# Altium PCB PCB-1-Layrer.PcbDoc
Units mm, origin at the board's own origin, x right, y up, seen from the top; angles counter-clockwise.
Board outline 152.4 x 101.6 mm, 2 copper layers (Top Layer, Bottom Layer); 50 components, 45 nets, 199 pads, 0 vias.
Unrouted connection lines stored in the file: 146.
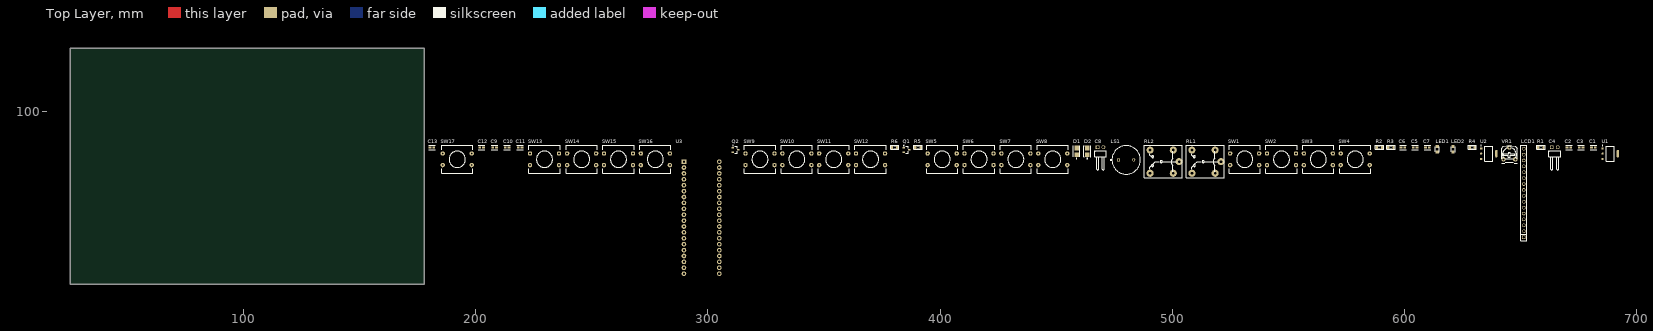
[diagram p0: Top Layer view]
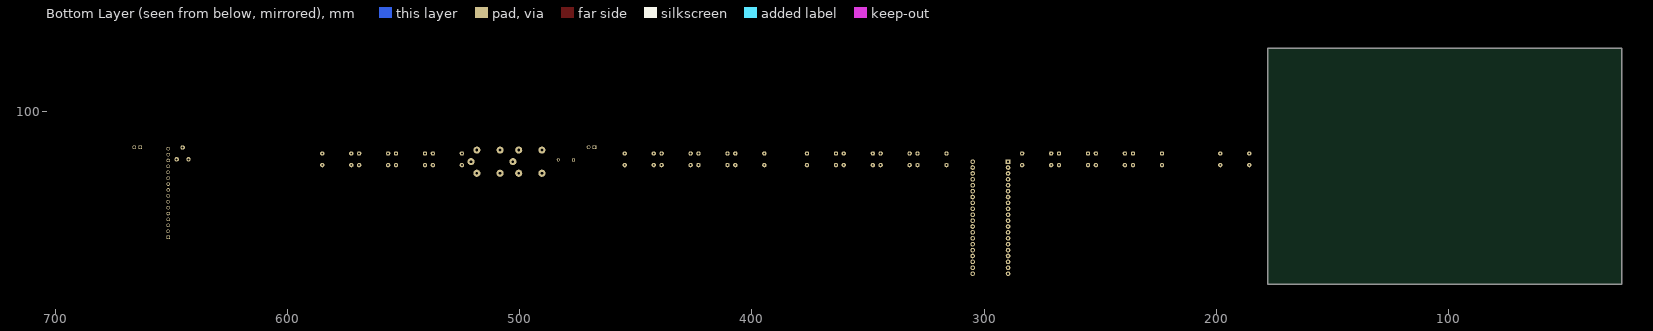
[diagram p1: Bottom Layer view, seen from below]

## Layer stack, top to bottom
Top Solder: solder mask 0.0102, Solder Resist, Dk 3.5
Top Layer: signal copper 0.0356
Dielectric 1: dielectric 0.32, FR-4, Dk 4.8
Bottom Layer: signal copper 0.0356
Bottom Solder: solder mask 0.0102, Solder Resist, Dk 3.5

## Board outline
25.4,25.4 177.8,25.4 177.8,127 25.4,127

## Design rules (kind name [scope] priority, off if disabled: settings)
Clearance [All] p1: gap=0.008 ignorepadtopadclearanceinfootprint=FALSE
PolygonConnect [All] p1: connectstyle=Relief reliefconductorwidth=0.254 reliefentries=4 polygonreliefangle="90 Angle" airgapwidth=0.254
RoutingVias [All] p1: holewidth=0.711 width=1.27 viastyle="Through Hole" minholewidth=0.711 minwidth=1.27 maxholewidth=0.711 maxwidth=1.27
SolderMaskExpansion [All] p1: expansion=0.102 istentingtop=FALSE
SupplyNets "Schematic Supply Nets_4" [InNet('+5V')] p1: voltage=0.000
SupplyNets "Schematic Supply Nets_3" [InNet('+12V')] p2: voltage=0.000
SupplyNets "Schematic Supply Nets_2" [InNet('GND')] p3: voltage=0.000
SupplyNets "Schematic Supply Nets_1" [InNet('+3V3')] p4: voltage=0.000
SupplyNets "Schematic Supply Nets" [InNet('+5')] p5: voltage=0.000
UnRoutedNet [All] p1: checkbadconnections=TRUE
Width [All] p1: maxlimit=0.254 minlimit=0.254 preferedwidth=0.254
29 further rules are at their usual default settings.

## Components (designator, comment, footprint, x,y, rotation, side; value= is the part's Value field where it differs from the comment)
C1 "100n" FP-GRM188-0_1-e0_2_0_55-IPC_A 681.482,84.328 r0 top
C2 "100u" FP-GRM188-0_1-e0_2_0_55-IPC_A 670.941,84.328 r0 top
C3 "10u" FP-GRM188-0_1-e0_2_0_55-IPC_A 676.148,84.328 r0 top
C4 "JP2" JP2-D1C 663.575,84.455 r0 top
C5 "100u" FP-GRM188-0_1-e0_2_0_55-IPC_A 604.647,84.328 r0 top
C6 "10u" FP-GRM188-0_1-e0_2_0_55-IPC_A 599.44,84.328 r0 top
C7 "100n" FP-GRM188-0_1-e0_2_0_55-IPC_A 609.981,84.328 r0 top
C8 "JP2" JP2-D1C 467.868,84.455 r0 top
C9 "0.1u" FP-GRM188-0_1-e0_2_0_55-IPC_A 208.153,84.328 r0 top
C10 "0.1u" FP-GRM188-0_1-e0_2_0_55-IPC_A 213.487,84.328 r0 top
C11 "0.1u" FP-GRM188-0_1-e0_2_0_55-IPC_A 219.075,84.328 r0 top
C12 "0.1u" FP-GRM188-0_1-e0_2_0_55-IPC_A 202.565,84.328 r0 top
C13 "0.1u" FP-GRM188-0_1-e0_2_0_55-IPC_A 181.102,84.328 r0 top
D1 "1N4007 SMD" FP-1N4007_SMD-IPC_C 458.851,82.677 r90 top
D2 "1N4007 SMD" FP-1N4007_SMD-IPC_C 463.423,82.677 r90 top
LCD1 "LCD 16x2A" JP16-C1T 651.51,45.72 r90 top value=LCD16x2A
LED1 "RED" LED-0805-Red 614.172,82.423 r90 top value="LED 3 - 5 ly 2 Colour"
LED2 "GREEN" LED-0805-Green 621.03,82.423 r90 top value="LED 3 - 5 ly 2 Colour"
LS1 "AT-1224-TWT-5V-2-R" FP-AT-1224-TWT-5V-2-R-MFG 480.187,78.994 r0 top
Q1 "S8050-SOT23" SOT95P240X115-3N 385.572,83.312 r0 top
Q2 "S8050-SOT23" SOT95P240X115-3N 311.912,83.312 r0 top
R1 "10K" RES-SMD-0805 658.876,84.455 r0 top
R2 "330" RES-SMD-0805 589.28,84.455 r0 top
R3 "330" RES-SMD-0805 594.233,84.455 r0 top
R4 "20K" RES-SMD-0805 629.285,84.455 r0 top
R5 "1K" RES-SMD-0805 390.525,84.455 r0 top
R6 "1K" RES-SMD-0805 380.492,84.455 r0 top
RL1 "Relay 10A/12V" "Relay - SRA-05VDC-CL" 513.334,78.232 r0 top value="Relay SPDT, 10A, 12V"
RL2 "Relay 10A/12V" "Relay - SRA-05VDC-CL" 495.3,78.232 r0 top value="Relay SPDT, 10A, 12V"
SW1 "SW" SW1-DIP-12x12x8-Black 531.241,79.248 r0 top value="SW chip 2 pin"
SW2 "SW" SW1-DIP-12x12x8-Black 547.116,79.248 r0 top value="SW chip 2 pin"
SW3 "SW" SW1-DIP-12x12x8-Black 562.991,79.248 r0 top value="SW chip 2 pin"
SW4 "SW" SW1-DIP-12x12x8-Black 578.866,79.248 r0 top value="SW chip 2 pin"
SW5 "SW" SW1-DIP-12x12x8-Black 400.939,79.248 r0 top value="SW chip 2 pin"
SW6 "SW" SW1-DIP-12x12x8-Black 416.814,79.248 r0 top value="SW chip 2 pin"
SW7 "SW" SW1-DIP-12x12x8-Black 432.689,79.248 r0 top value="SW chip 2 pin"
SW8 "SW" SW1-DIP-12x12x8-Black 448.564,79.248 r0 top value="SW chip 2 pin"
SW9 "SW" SW1-DIP-12x12x8-Black 322.453,79.248 r0 top value="SW chip 2 pin"
SW10 "SW" SW1-DIP-12x12x8-Black 338.328,79.248 r0 top value="SW chip 2 pin"
SW11 "SW" SW1-DIP-12x12x8-Black 354.203,79.248 r0 top value="SW chip 2 pin"
SW12 "SW" SW1-DIP-12x12x8-Black 370.078,79.248 r0 top value="SW chip 2 pin"
SW13 "SW" SW1-DIP-12x12x8-Black 229.616,79.248 r0 top value="SW chip 2 pin"
SW14 "SW" SW1-DIP-12x12x8-Black 245.618,79.248 r0 top value="SW chip 2 pin"
SW15 "SW" SW1-DIP-12x12x8-Black 261.493,79.248 r0 top value="SW chip 2 pin"
SW16 "SW" SW1-DIP-12x12x8-Black 277.368,79.248 r0 top value="SW chip 2 pin"
SW17 "SW" SW1-DIP-12x12x8-Black 192.024,79.248 r0 top value="SW chip 2 pin"
U1 "AMS1117-3.3" FP-AMS1117-IPC_C 688.721,81.661 r0 top
U2 "AMS1117-3.3" FP-AMS1117-IPC_C 636.397,81.661 r0 top
U3 "STM32_Bluepill" STM32F103_BluePill 297.307,54.102 r0 top
VR1 "20k" VR-S2 642.747,79.248 r0 top value="Volume 50k"

## Footprints (in the part's own frame and the unit in brackets; to place one, negate y for a bottom-side part, rotate by r counter-clockwise, add the part's x,y. Pads: shape width x height; smd on the part's side, far side on the other; paste and mask are expansions set on the pad)
FP-1N4007_SMD-IPC_C [mm]
  rect 2.1x2 smd paste+0 mask+0: 1(-1.45,0) 2(1.45,0)
  silkscreen extent -3.25,-1.45 2.3,1.45, body extent -2.6,-1.55 2.6,1.55, height 0.25
FP-AMS1117-IPC_C [mm]
  rect 1.004x0.872 smd paste+0 mask+0: 1(-3.295,2.29)
  rrect100% 1.004x0.872 smd paste+0 mask+0: 2(-3.295,0) 3(-3.295,-2.29)
  rrect87% 1.004x3.182 smd paste+0 mask+0: 4(3.295,0)
  silkscreen extent -3.42,-3.25 1.75,3.62, body extent -3.9,-3.35 3.9,3.35, height 0.25
FP-AT-1224-TWT-5V-2-R-MFG [mm]
  rect 1.35x1.35 hole 0.85 paste-2539.97 mask+0: 1(-3.25,0)
  round 1.35 hole 0.85 paste-2539.97 mask+0: 2(3.25,0)
  silkscreen extent -6.75,-6.15 6.15,6.15, body extent -6.25,-6.25 6.25,6.25, height 0.25
FP-GRM188-0_1-e0_2_0_55-IPC_A [mm]
  rect 1.208x1.012 smd paste+0 mask+0: 1(-0.802,0) 2(0.802,0)
  silkscreen extent -1.41,-0.91 1.41,0.91, body extent -1.91,-1.01 1.91,1.01, height 0.25
JP2-D1C [mm] "2 pins, 1 row, right angled, gold plating"
  rect 1.6x1.6 hole 1.1: 1(0,0)
  round 1.6 hole 1.1: 2(2.54,0)
  silkscreen extent -1.27,-9.88 3.81,-1.5, body extent -1.27,-10.06 3.81,0.3, height 2.55
JP16-C1T [mm] "16 row, straight, gold plating"
  rect 1.52x1.52 hole 1.02: 1(0,0)
  round 1.52 hole 1.02: 2(2.54,0) 3(5.08,0) 4(7.62,0) 5(10.16,0) 6(12.7,0) 7(15.24,0) 8(17.78,0) 9(20.32,0) 10(22.86,0) 11(25.4,0) 12(27.94,0) 13(30.48,0) 14(33.02,0) 15(35.56,0) 16(38.1,0)
  silkscreen extent -1.52,-1.27 39.62,1.27, body extent -1.52,-1.25 39.62,1.25, height 8.51
LED-0805-Green [mil]
  rect 50x55 smd: 1(0,0) 2(90,0)
  silkscreen extent 0,-35 90,35, body extent 5,-25 85,25, height 43
LED-0805-Red [mil]
  rect 50x55 smd: 1(0,0) 2(90,0)
  silkscreen extent 0,-35 90,35, body extent 5,-25 85,25, height 43
"Relay - SRA-05VDC-CL" [mil] "15.5 x 12.3 x 14mm"
  round 120 hole 45: 1(302.94,0) 2(-189.15,-196.85) 3(-189.15,196.85) 4(204.52,196.85) 5(204.52,-196.85)
  silkscreen extent -289,-275 361,276, body extent -275,-236 338,236, height 103
RES-SMD-0805 [mil]
  rect 39.37x55 smd: 1(-45,0) 2(45,0)
  silkscreen extent -70,-34 70,33, body extent -39,-25 39,25, height 31
SOT95P240X115-3N [mm] "SOT23, 3-Leads, Body 2.90x2.40mm, Pitch 0.95mm, IPC Medium Density"
  rect 0.95x0.6 smd: 1(-1.175,0.95) 2(-1.175,-0.95) 3(1.175,0)
  silkscreen extent -1.3,-1.5 0.7,1.92, body extent -1.28,-1.5 1.28,1.5, height 1.15
STM32F103_BluePill [mm]
  rect 2x2 hole 1.02: 1(-7.62,24.13)
  round 2 hole 1.02: 2(-7.62,21.59) 3(-7.62,19.05) 4(-7.62,16.51) 5(-7.62,13.97) 6(-7.62,11.43) 7(-7.62,8.89) 8(-7.62,6.35) 9(-7.62,3.81) 10(-7.62,1.27) 11(-7.62,-1.27) 12(-7.62,-3.81) 13(-7.62,-6.35) 14(-7.62,-8.89) 15(-7.62,-11.43) 16(-7.62,-13.97) 17(-7.62,-16.51) 18(-7.62,-19.05) 19(-7.62,-21.59) 20(-7.62,-24.13) 21(7.62,-24.13) 22(7.62,-21.59) 23(7.62,-19.05) 24(7.62,-16.51) 25(7.62,-13.97) 26(7.62,-11.43) 27(7.62,-8.89) 28(7.62,-6.35) 29(7.62,-3.81) 30(7.62,-1.27) 31(7.62,1.27) 32(7.62,3.81) 33(7.62,6.35) 34(7.62,8.89) 35(7.62,11.43) 36(7.62,13.97) 37(7.62,16.51) 38(7.62,19.05) 39(7.62,21.59) 40(7.62,24.13)
  body extent -11.41,-27.16 11.45,31.26, height 22
SW1-DIP-12x12x8-Black [mm] "SW button 4pin, 12x12mm"
  round 1.905 hole 0.787: 1(-6.25,2.5) 1(6.25,2.5) 2(-6.25,-2.5) 2(6.25,-2.5)
  silkscreen extent -6.71,-6.01 6.71,6.01, body extent -6.71,-6.01 6.71,6.01, height 7.87
VR-S2 [mil] "Resistor Variable"
  round 75 hole 35: 1(0,0) 2(100,200) 3(200,0)
  silkscreen extent -31,-64 231,226, body extent -23,-64 232,219, height 299

## Part data
C1 C2 C3 C5 C6 C7 C9 C10 C11 C12 C13: library part CMP-2006-02792-2, "Chip Multilayer Ceramic Capacitors for General Purpose, 0603, 10uF, X5R, 15%, 20%, 6.3V", Capacitance=10uF, Case Code (Imperial)=0603, Case Code (Metric)=1608, Dielectric=X5R, Max Operating Temperature=85°C, Min Operating Temperature=-55°C, Package Quantity=4000, Tolerance=20%, Voltage=6.3V, Case/Package=0603, Depth=0.8mm, Height=0.8mm, Lead Free="Lead Free", Length=1.6mm, Material=Ceramic, Mount="Surface Mount", Packaging="Tape and Reel", Radiation Hardening=No, REACH SVHC="No SVHC", Termination=SMD/SMT, Thickness=0.035inch, Voltage Rating=6.3V, Voltage Rating (DC)=6.3V, Width=0.031inch
C4 C8: "WR-PHD 2.54 mm Angled Socket Header", Manufacturer="W¨¹rth Elektronik eiSos GmbH", partNo=613002143121, ComponentLink1 Description=Manufacturer, ComponentLink1URL=http://www.we-online.com, ComponentLink2 Description=Datasheet, ComponentLink2URL=http://katalog.we-online.de/em/datasheet/6130xx143121.pdf, Created by="Karrer Zheng", Created Date="29 March 2013", NoPins=02
D1 D2: library part CMP-12389-000001-1, "Rectifier, 1Kv, 1A, Do-214Ac Rohs Compliant: Yes"
LCD1: library part LCD16x2A, "LCD dipslay 16 char, 2 line"
LED1 LED2: library part "LED SMD"
LS1: library part CMP-231722-000001-1, "BUZZER MAGNETIC 5V 12MM TH", Frequency=2.4kHz, Max Operating Temperature=70°C, Max Supply Current=40mA, Min Operating Temperature=-30°C, Voltage Rating=5V, Contact Plating=Tin, Diameter=12mm, Height=9mm, Mount="Through Hole", Operating Supply Current=40mA, Packaging=Tray, Sensing Method=Magnetic, Series=AT, Termination="PC Pins"
Q1 Q2: "S8050 J3Y Transistor NPN 25V 0.5A 3 Pins SOT-23"
R1 R2 R3 R4 R5 R6: library part Res-SMD, "Resistor", Manufacturer="Generic Components", Class=Passive, Published=08/06/2000, Publisher="Altium Hobart Technology Centre"
RL1 RL2: library part "Relay 5", "Relay SPDT,10A - 12VDC 5 Pin"
SW1 SW2 SW3 SW4 SW5 SW6 SW7 SW8 SW9 SW10 SW11 SW12 SW13 SW14 SW15 SW16 SW17: library part SW2, "Switch button 2 pin"
U1 U2: library part CMP-209535-000001-1, "LDO Voltage Regulators 1A, 3.3V", Dropout Voltage=1.1V, Manufacturer="Advanced Monolithic Systems", Max Junction Temp=+125°C, Max Power Dissipation=1.2W, Max Supply Voltage=15V, Nominal Supply Current=5mA, Output Current=1A, Output Voltage=3.3V, Package=AMS1117, Temperature="-40°C to +125°C", Temperature Range Low=-40°C, Automotive=No, Category=IC, ComponentLink2Description=Datasheet, ComponentLink2URL=http://www.advanced-monolithic.com/pdf/ds1117.pdf, Device Class L1="Integrated Circuits (ICs)", Device Class L2="Power Management ICs", Device Class L3="Voltage Regulators - Linear", Height=1.8mm, Ipc Land Pattern Name=SOT229P700X180-4, Lead Free=Yes, Manufacturer Part Number=AMS1117-3.3, Number Of Outputs=1, Octopart=https://octopart.com/ams1117-3.3-advanced+monolithic+systems-25899300, Output Type=Fixed, RoHS=TRUE, Standoff Height=0.64mm, Temperature Range High=+125°C
VR1: library part VR-S, "Var Resistor"

## Nets (pads, with @x,y where several pads share a name; then routed paths per layer and width w, separated by ;. In a path a pad name is that pad's centre, name@x,y a point inside that pad or via, vN(x,y) a via of type N, cw(c..) or ccw(c..) an arc to the next point about the centre after c; other vN are vias at no path point)
+3V3: C1.1 C3.1 U1.2 U1.4 U3.18 U3.40
+5: D1.1 D2.1 RL1.5 RL2.5
+5V: C6.1 C7.1 LCD1.2 LCD1.15 LS1.1 RL2.1 U2.2 U2.4 VR1.1
+12V: C2.1 C5.2 C8.1 R1.1 R4.1 RL1.1 U1.3 U2.3
D4_LCD: LCD1.11 U3.9
D5_LCD: LCD1.12 U3.10
D6_LCD: LCD1.13 U3.11
D7_LCD: LCD1.14 U3.12
EN_LCD: LCD1.6 U3.6
GND: C1.2 C2.2 C3.2 C4.1 C5.1 C6.2 C7.2 C8.2 C9.2 C10.2 C11.2 C12.2 C13.2 LCD1.1 LCD1.5 LCD1.16 LS1.2 Q1.2 Q2.2 R2.2 R3.2 R4.2 RL1.3 RL2.3 SW17.1 U1.1 U2.1 U3.19 U3.20 U3.39 VR1.3
NetC4_2: C4.2 R1.2
NetD1_2: D1.2 Q1.3 RL1.4
NetD2_2: D2.2 Q2.3 RL2.4
NetLED1_2: LED1.2 R2.1
NetLED2_2: LED2.2 R3.1
NetQ1_1: Q1.1 R5.1
NetQ2_1: Q2.1 R6.1
PA2: R6.2 U3.7
PA3: R5.2 U3.8
PA8: U3.25
PA9: U3.26
PA10: U3.27
PA11: U3.28
PA12: U3.29
PA15: U3.30
PB0: SW1.1 SW5.1 SW9.1 SW13.1 U3.13
PB1: SW2.1 SW6.1 SW10.1 SW14.1 U3.14
PB3: SW4.1 SW8.1 SW12.1 SW16.1 U3.31
PB4: C11.1 SW1.2 SW2.2 SW3.2 SW4.2 U3.32
PB5: C10.1 SW5.2 SW6.2 SW7.2 SW8.2 U3.33
PB6: C12.1 SW9.2 SW10.2 SW11.2 SW12.2 U3.34
PB7: C9.1 SW13.2 SW14.2 SW15.2 SW16.2 U3.35
PB8: SW3.1 SW7.1 SW11.1 SW15.1 U3.36
PB9: U3.37
PB10: LED2.1 U3.15
PB11: LED1.1 U3.16
PB12: U3.21 U3.22
PB14: U3.23
PB15: U3.24
PC13: U3.2
PC14: U3.3
PC15: U3.4
Reset: C13.1 SW17.2 U3.17
RS_LCD: LCD1.4 U3.5
VS_LCD: LCD1.3 VR1.2
pads on no net: LCD1.7 LCD1.8 LCD1.9 LCD1.10 RL1.2 RL2.2 U3.1 U3.38